# Altium PCB Power supply.PcbDoc
Units mil, origin at the board's own origin, x right, y up, seen from the top; angles counter-clockwise.
Board outline 2375 x 1485 mil, 2 copper layers (Top Layer, Bottom Layer); 23 components, 8 nets, 53 pads, 0 vias.
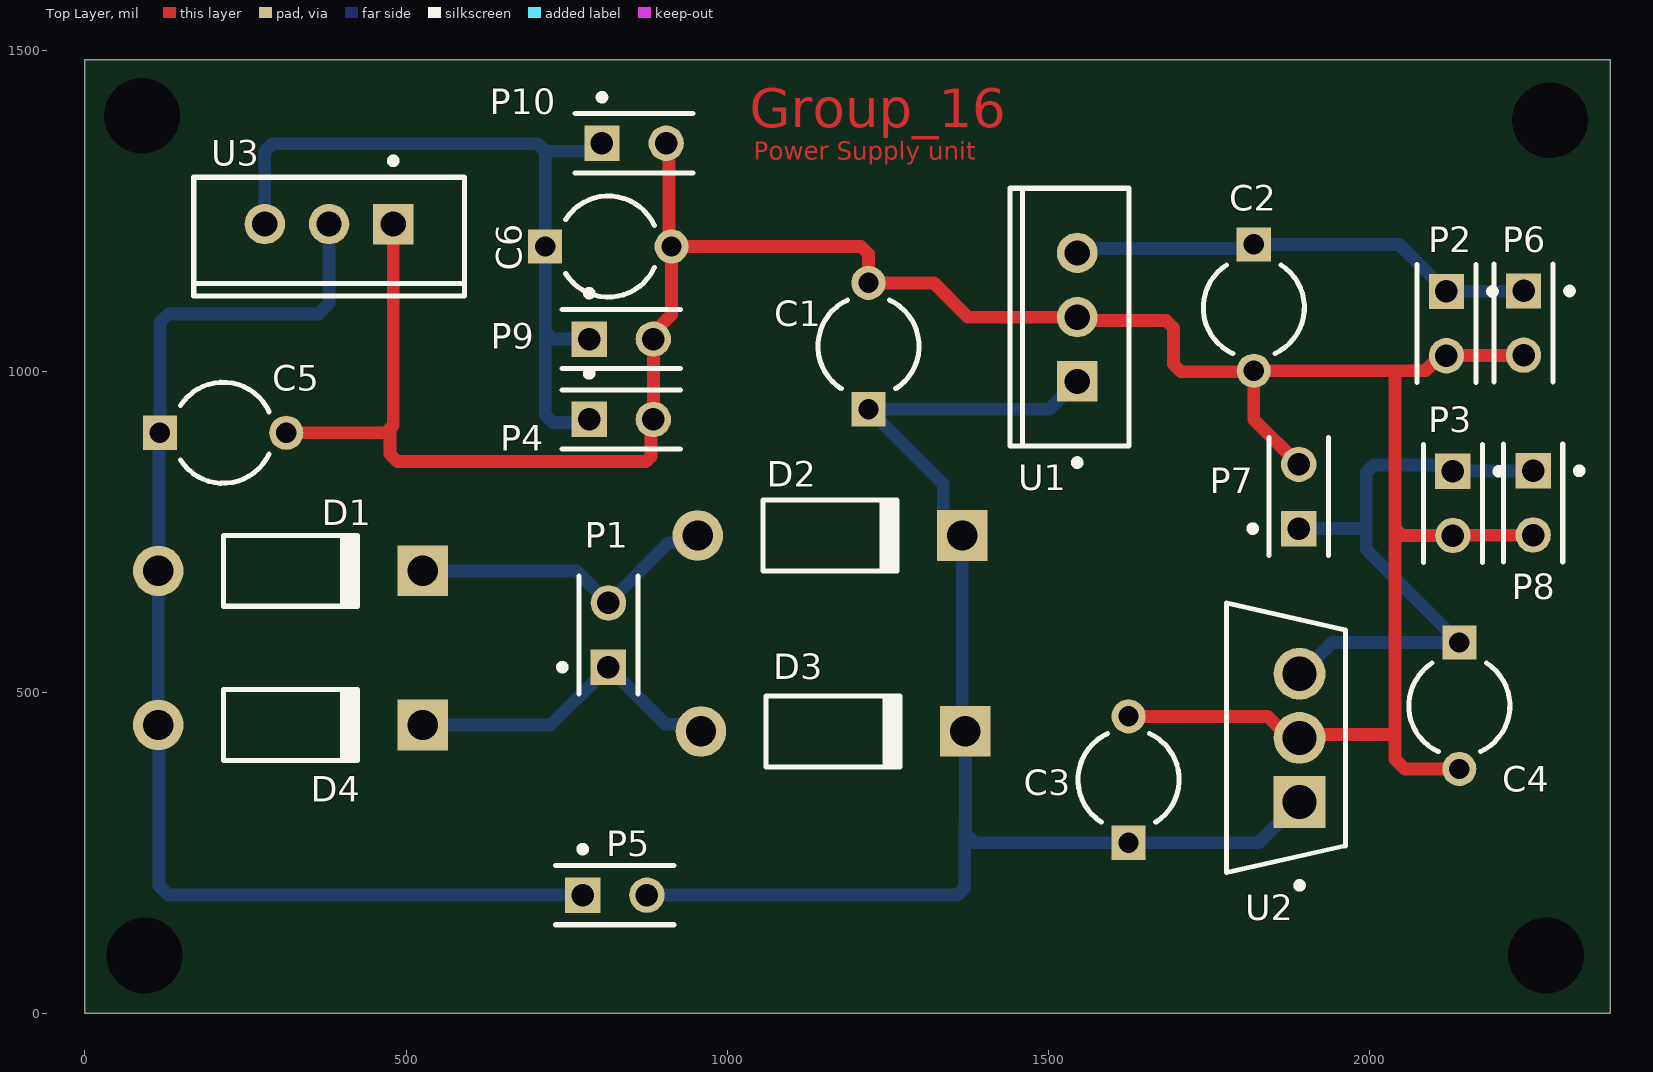
[diagram p0: Top Layer view]
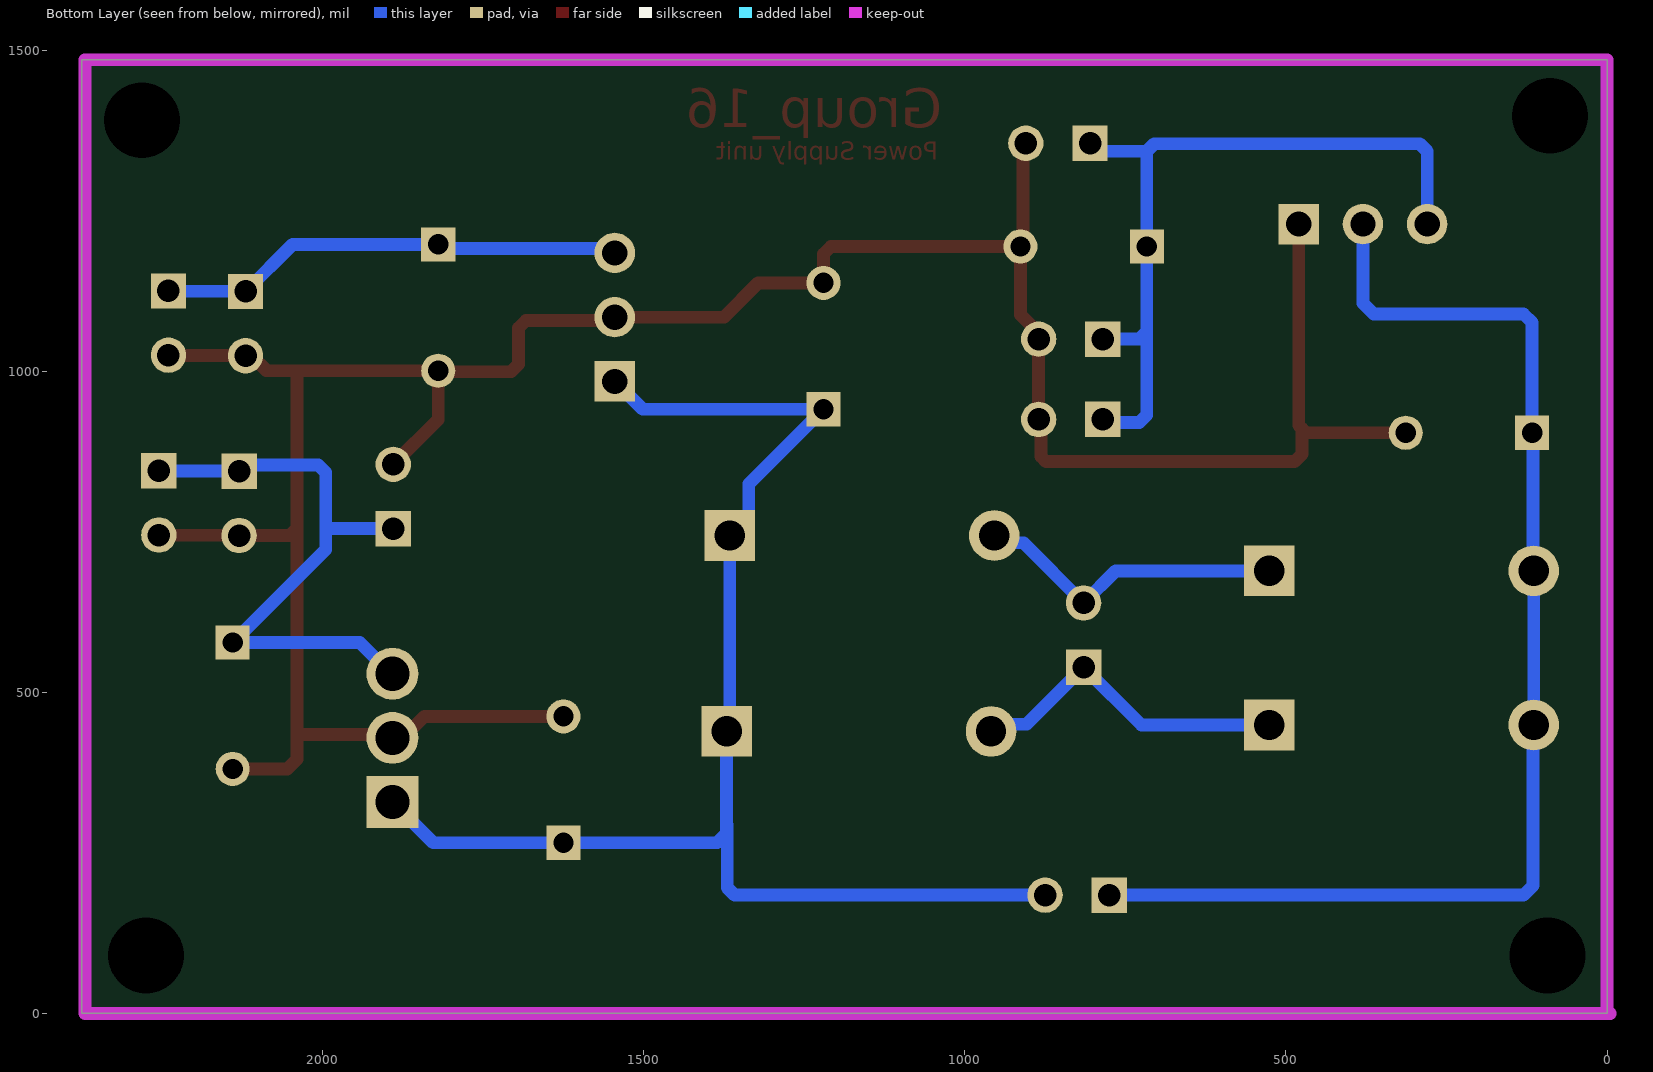
[diagram p1: Bottom Layer view, seen from below]

## Layer stack, top to bottom
Top Solder: solder mask 0.4, Solder Resist, Dk 3.5
Top Layer: signal copper 1.4
Dielectric 1: dielectric 12.6, FR-4, Dk 4.8
Bottom Layer: signal copper 1.4
Bottom Solder: solder mask 0.4, Solder Resist, Dk 3.5

## Board outline
0,0 2375,0 2375,1485 0,1485

## Design rules (kind name [scope] priority, off if disabled: settings)
Clearance [All] p1: gap=10 ignorepadtopadclearanceinfootprint=FALSE except(0: Arc-Hole Track-Hole SMDPad-Hole THPad-Hole Via-Hole Fill-Hole Poly-Hole Region-Hole Text-Hole)
PolygonConnect [All] p1: connectstyle=Relief reliefconductorwidth=10 reliefentries=4 polygonreliefangle="90 Angle" airgapwidth=10
RoutingVias [All] p1: holewidth=28 width=50 viastyle="Through Hole" minholewidth=28 minwidth=50 maxholewidth=28 maxwidth=50
SolderMaskExpansion [All] p1: expansion=4 istentingtop=FALSE
Width [All] p1: maxlimit=20 minlimit=20 preferedwidth=20 minimp=50.000000 maximp=50.000000 favimp=50.000000
30 further rules are at their usual default settings.

## Components (designator, comment, footprint, x,y, rotation, side; value= is the part's Value field where it differs from the comment)
C1 "Cap2" CAPR5-4X5 1220.02,1039.19 r90 top value=0.33uF
C2 "Cap2" CAPR5-4X5 1820.02,1099.19 r270 top value=0.1uF
C3 "Cap2" CAPR5-4X5 1625.02,364.19 r90 top value=0.33uF
C4 "Cap2" CAPR5-4X5 2140.02,479.19 r270 top value=0.1uF
C5 "Cap2" CAPR5-4X5 215.02,904.19 r0 top value=0.33uF
C6 "Cap2" CAPR5-4X5 815.02,1194.19 r0 top value=0.1uF
D1 "Diode 1N4001" DO-41 320.02,689.19 r0 top
D2 "Diode 1N4001" DO-41 1160.02,744.19 r0 top
D3 "Diode 1N4001" DO-41 1165.02,439.19 r0 top
D4 "Diode 1N4001" DO-41 320.02,449.19 r0 top
P1 "5-146280-2" TECO-5-146280-2_V 815.02,589.19 r90 top
P2 "5-146280-2" TECO-5-146280-2_V 2120.02,1074.19 r270 top
P3 "5-146280-2" TECO-5-146280-2_V 2130.02,794.19 r270 top
P4 "5-146280-2" TECO-5-146280-2_V 835,925 r0 top
P5 "5-146280-2" TECO-5-146280-2_V 825.02,184.19 r0 top
P6 "5-146280-2" TECO-5-146280-2_V 2240,1075 r270 top
P7 "5-146280-2" TECO-5-146280-2_V 1890,805 r90 top
P8 "5-146280-2" TECO-5-146280-2_V 2255,795 r270 top
P9 "5-146280-2" TECO-5-146280-2_V 835,1050 r0 top
P10 "5-146280-2" TECO-5-146280-2_V 855,1355 r0 top
U1 "LM7805CT" FAIR-TO-220-3 1545.02,1084.19 r180 top
U2 "LM7812CT" FP-TO220B03-MFG 1870.02,429.19 r180 top
U3 "LM7912CT" NDE0003A 380.02,1229.19 r180 top

## Footprints (in the part's own frame and the unit in brackets; to place one, negate y for a bottom-side part, rotate by r counter-clockwise, add the part's x,y. Pads: shape width x height; smd on the part's side, far side on the other; paste and mask are expansions set on the pad)
CAPR5-4X5 [mm] "Capacitor; 2 Leads"
  rect 1.35x1.35 hole 0.8: 1(-2.5,0)
  round 1.35 hole 0.8: 2(2.5,0)
  silkscreen extent -1.69,-2 1.82,2
DO-41 [mm] "Diode, Axial; Body 5.2 x 2.7 mm (LxDia. max), Lead Dia. 0.86 mm (max)"
  round 2 hole 1.2: 1(-5.23,0)
  rect 2x2 hole 1.2: 2(5.23,0)
  silkscreen extent -2.65,-1.4 2.75,1.4
FAIR-TO-220-3 [mm] "FM, 3-Leads, Body 10.2x4.7mm, Pitch 2.54mm"
  rect 1.6x1.6 hole 1: 1(0,2.54)
  round 1.6 hole 1: 2(0,0) 3(0,-2.54)
  silkscreen extent -2.04,-5.1 2.66,5.87, body extent -2.04,-5.1 2.66,5.1, height 18.95
FP-TO220B03-MFG [mm]
  rect 2.05x2.05 hole 1.35 paste-1000 mask+0: 1(-0.54,2.535)
  round 2.05 hole 1.35 paste-1000 mask+0: 2(-0.54,0) 3(-0.54,-2.535)
  silkscreen extent -2.35,-5.34 2.35,5.96, body extent -2.45,-5.44 2.45,5.44, height 0.25
NDE0003A [mm] "FM, 3-Leads, Body 10.7x4.7mm, Pitch 2.54mm"
  rect 1.6x1.6 hole 1: 1(-2.54,0)
  round 1.6 hole 1: 2(0,0) 3(2.54,0)
  silkscreen extent -5.35,-2.62 5.35,2.85, body extent -5.4,-1.9 5.4,2.9, height 19.4
TECO-5-146280-2_V [mm] "Connector, 2-Leads, Body 4.67x2.34mm, Pitch 2.54mm"
  rect 1.4x1.4 hole 0.89: 1(-1.27,0)
  round 1.4 hole 0.89: 2(1.27,0)
  silkscreen extent -2.33,-1.17 2.33,1.94, body extent -2.34,-1.17 2.34,1.17, height 5.33

## Part data
C1 C2 C3 C4 C5 C6: "Capacitor", PackageDescription="Capacitor; 2 Leads", PackageReference=CAPR5-4X5, Published=23-Sep-2002, Publisher="Altium Limited"
D1 D2 D3 D4: "1 Amp General Purpose Rectifier", Code_JEDEC=DO-204-AL, ComponentLink1Description="Manufacturer Link", ComponentLink1URL=http://www.fairchildsemi.com/, ComponentLink2Description=Datasheet, ComponentLink2URL=http://www.fairchildsemi.com/ds/1N%2F1N4001.pdf, DatasheetVersion=1998, LatestRevisionDate=17-Jul-2002, LatestRevisionNote="Re-released for DXP Platform.", PackageDescription="Diode, Axial; Body 5.2 x 2.7 mm (LxDia. max), Lead Dia. 0.86 mm (max)", PackageReference=DO-41, PackageVersion=Aug-1999, Published=8-Jun-2000, Publisher="Altium Limited"
P1 P2 P3 P4 P5 P6 P7 P8 P9 P10: library part CMP-2000-07492-1, "Male Header, Pitch 2.54 mm, 1 x 2 Position, Height 8.21 mm, Tail Length 3.05 mm, -65 to 105 degC, RoHS, Bulk", Case\/Package=100, Colour=Black, Current Rating=3A, Flammability Rating=UL94V-0, High Temperature Housing=Yes, Manufacturer="TE Connectivity", Max Current Rating=5A, Max Operating Temperature=105degC, Min Operating Temperature=-65degC, Package Description="Male Header, Pitch 2.54 mm, 1 x 2 Position, Height 8.21 mm, Tail Length 3.05 mm", Package Quantity=500, Approvals=CSA, Board Standoff=No(Without), Connector Type=Header, Contact Gender=Male, Contact Material=CopperAlloy, Contact Mating Length=0.23inch, Contact Plating=Matte, Contact Protection=No(Without), Contact Shape=Square, Datasheet URL=http://www.te.com/commerce/DocumentDelivery/DDEController?Action=showdoc&DocId=Customer+Drawing%7F146280%7FH1%7Fpdf%7FEnglish%7FENG_CD_146280_H1.pdf%7F5-146280-2, Datasheet Version="Rev. H1, 08/2016", Depth=2.34mm, Gasket=No(Without), High Speed Serial Data Connector=No, Housing Colour=Black, Housing Material=Polymer, Keyed=No, Length=4.67mm, Manufacturer URL=http://www.te.com/, Mating Alignment=No(Without), Mating Connector Lock=No(Without), Mating Post Length=0.23inch, Mount=ThroughHole, Mounting Technology=ThroughHole, Number of Contacts=2, Number of Positions=2, Number of Rows=1, Orientation=Straight, Package Reference=5-146280-2, Packaging=Carton, Panel Mount Retention=No(Without), PCB Mount Retention=Without, PCB Mounting Orientation=Vertical, PCB Thickness=0.063inch, Pitch=2.54mm, Radiation Hardening=No, RoHSCompliant=true, Row Spacing=2.54mm, Selectively Loaded=No(Without), Stabilizers=No(Without), Termination=ThroughHole, Termination Post Length=0.12inch
U1: library part CMP-2000-04938-1, "Positive Voltage Regulator, 5 V, 1 A, -40 to 125 degC, 3-Pin TO-220, RoHS, Tube", Manufacturer=FairchildSemiconductor, Maximum Input Voltage=35V, Maximum Output Current=2.2(Typ)A, Maximum Quiescent Current=8mA, Operating Temperature=-40to125degC, Output Voltage=5V, Package=3TO-220AB, Package Description="3-Pin Through Hole Device, Body 10 x 4.5 mm, Pitch 2.54 mm", Package Reference=TO-220, Typical Dropout Voltage @ Current=2@1AV, Accuracy=±4%, Category=LinearRegulator, Datasheet URL=https://datasheet.ciiva.com/26904/lm7805ct-26904988.pdf, Datasheet Version=Aug-12, Line Regulation=100mV, Load Regulation=100mV, Manufacturer URL=https://www.fairchildsemi.com/, Mounting=ThroughHole, Number of Outputs=1, Output Type=Fixed, Package URL=https://www.fairchildsemi.com/package-drawings/TO/TO220B03.pdf, Packaging=Rail/Tube, Polarity=Positive, Rad Hard=No, Type=Linear
U2: library part CMP-07128-000015-1, "IC REG LINEAR 12V 1A TO220-3", Dropout Voltage=2V, Manufacturer="ON Semiconductor", Max Supply Voltage=35V, Nominal Supply Current=5.1mA, Output Current=1A, Output Voltage=12V, Package=TO220B03, Temperature="-40°C to +125°C", Temperature Range High=+125°C, Temperature Range Low=-40°C, Accuracy Percentage=4%, Automotive=No, Category=IC, ComponentLink2Description=Datasheet, ComponentLink2URL=https://www.mouser.in/datasheet/2/308/LM7812-1125088.pdf, Device Class L1="Integrated Circuits (ICs)", Device Class L2="Power Management ICs", Device Class L3="Voltage Regulators - Linear", Digikey Description="IC REG LINEAR 12V 1A TO220-3", Height=20.4mm, Ipc Land Pattern Name=TO-220, Lead Free=Yes, Manufacturer Part Number=LM7812CT, Number of Outputs=1, Obsolete Part=true, Octopart=https://octopart.com/lm7812ct-on+semiconductor-14383031, Output Type=Fixed, RoHS=TRUE, Standoff Height=2.7mm
U3: library part CMP-0062-02472-3, "3-Terminal Negative Regulator, 3-pin TO-220", Manufacturer="Texas Instruments", PackageTopMarking=NSUZXYTTE#*LM7912CT, PowerWise=N, ComponentLink1Description="Datasheet URL", ComponentLink1URL=http://www.ti.com/general/docs/lit/getliterature.tsp?genericPartNumber=LM7912&fileType=pdf, CompType="LDO IC", PackageDescription="TO-220, Molded, 3 Lead, Straight", PackageReference=NDE0003A, PinCount=3, RoHS=N

## Free pads (board coordinates)
  round 60 hole 118.11: 6(88.91,1397.73) 6(92.44,90.16) 6(2275,90) 6(2281.48,1390.87)

## Nets (pads, with @x,y where several pads share a name; then routed paths per layer and width w, separated by ;. In a path a pad name is that pad's centre, name@x,y a point inside that pad or via, vN(x,y) a via of type N, cw(c..) or ccw(c..) an arc to the next point about the centre after c; other vN are vias at no path point)
GND: C1.2 C2.2 C3.2 C4.2 C5.2 C6.2 P2.2 P3.2 P4.2 P6.2 P7.2 P8.2 P9.2 P10.2 U1.2 U2.2 U3.1 | length 4458.2
  Top Layer w20: C5.2 468.3,904.19 475.02,910.91 ; U3.1 480.02,915.91 475.02,910.91 ; P10.2 909.22,1350.78 909.22,1198.41 C6.2 ; C3.2 1841.42,462.62 1874.85,429.19 U2.2 1896.28,434.19 2040.02,434.19 ; P7.2 1820.02,924.98 C2.2 ; C4.2 2055.16,380.77 2040.02,395.91 2040.02,434.19 ; P6.2 2239.6,1024.6 2120.42,1024.6 P2.2 2110.51,1024.19 2087.09,1000.77 2040.02,1000.77 ; P8.2 2254.6,744.6 2130.42,744.6 P3.2 2051.73,744.19 2040.02,755.91 ; 475.02,910.91 475.02,870.91 486.73,859.19 873.3,859.19 881.55,867.44 881.55,921.55 P4.2 P9.2 885,1059.5 913.44,1087.94 C6.2 ; C6.2 1208.3,1194.19 1220.02,1182.48 C1.2 1321.59,1137.62 1375.02,1084.19 U1.2 1550.02,1079.19 1683.3,1079.19 1695.02,1067.48 1695.02,1010.91 1706.73,999.19 1818.44,999.19 C2.2 ; C2.2 2040.02,1000.77 ; 2040.02,434.19 2040.02,755.91 ; 2040.02,755.91 2040.02,1000.77
NetC1_1: C1.1 C3.1 D2.2 D3.2 P5.2 U1.1 U2.1 | length 2216.8
  Bottom Layer w20: P5.2 1358.3,184.19 1370.02,195.91 1370.02,293.29 1370.92,294.19 ; U1.1 1501.59,940.77 C1.1 1336.55,824.23 1336.55,773.56 D2.2 1365.92,444.19 D3.2 1370.92,294.19 ; U2.1 1827.65,265.77 C3.1 1386.06,265.77 1370.92,280.91 1370.92,294.19
NetC2_1: C2.1 P2.1 P6.1 U1.3 | length 731.3
  Bottom Layer w20: U1.3 1551.73,1190.91 1813.3,1190.91 C2.1 2046.59,1197.62 P2.1 2120.42,1124.6 2239.6,1124.6 P6.1
NetC4_1: C4.1 P3.1 P7.1 P8.1 U2.3 | length 968.1
  Bottom Layer w20: P7.1 1995.02,755 ; U2.3 1893.53,529 1942.15,577.62 C4.1 1995.02,722.62 1995.02,755 ; P8.1 2254.6,844.6 2130.42,844.6 P3.1 2120.02,854.19 2006.73,854.19 1995.02,842.48 1995.02,755
NetC5_1: C5.1 D1.1 D4.1 P5.1 U3.2 | length 1943.4
  Bottom Layer w20: U3.2 380.02,1105.91 363.3,1089.19 130.02,1089.19 116.59,1075.77 C5.1 115.35,902.95 115.35,690.43 D1.1 D4.1 115.02,448.29 115.02,199.19 130.02,184.19 P5.1
NetC6_1: C6.1 P4.1 P9.1 P10.1 U3.3 | length 1212.5
  Bottom Layer w20: U3.3 280.02,1342.48 291.73,1354.19 704.87,1354.19 716.59,1342.48 ; P4.1 780,920 728.31,920 716.59,931.72 716.59,1061.72 ; P9.1 728.31,1050 716.59,1061.72 ; P10.1 792.48,1342.48 716.59,1342.48 ; 716.59,1061.72 C6.1 716.59,1342.48
NetD1_2: D1.2 D2.1 P1.2 | length 492.4
  Bottom Layer w20: D1.2 765.02,689.19 P1.2 908.78,732.95 942.87,732.95 D2.1
NetD3_1: D3.1 D4.2 P1.1 | length 511.9
  Bottom Layer w20: D4.2 725.02,449.19 P1.1 903.78,450.43 947.87,450.43 D3.1

## Keep-outs
Bottom Layer:
  lines w19.68: -5,0 0,5 0,1485 2325,1485 2370,1485 2370,0 2320,0 -5,0

## Other copper
Top Layer:
  text "Group_16" at 1035,1379.99 h60
  text "Power Supply unit" at 1041.07,1329.33 h28